# EAGLE board Universal USB-UART Adapter (EAGLE 6.1)
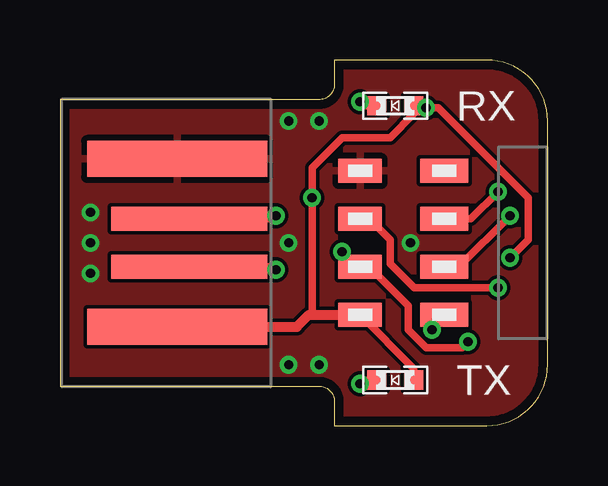
[diagram p0: board, top side]
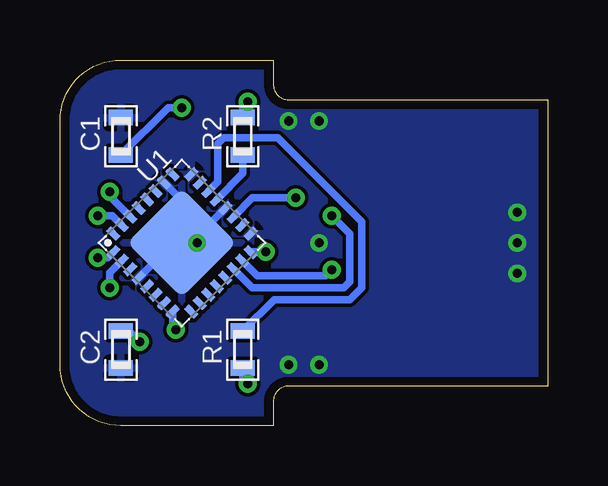
[diagram p1: board, bottom side, seen from below]

Size 20.32 x 15.24 mm. Coordinates in mm from the lower left corner, seen from the top.
Outline: 11.43,0 17.78,0 arc90 20.32,2.54 20.32,12.7 arc90 17.78,15.24 11.43,15.24 11.43,14.22 arc-90 10.79,13.59 0,13.59 0,1.65 10.79,1.65 arc-90 11.43,1.02 11.43,0
Copper layers (1*16): Top 0.0356mm / dielectric 1.5011mm / Bottom 0.0356mm
Design rules: minimum track width 6mil, minimum drill 13mil, track to track 6mil, track to pad 6mil, pad to pad 6mil, via to via 6mil, smd to smd 6mil, copper to edge 15mil, drill to drill 6mil, minimum pad ring 7mil, minimum via ring 7mil, stop-mask expansion 4mil, vias tented up to drill 0mil, thermal gap 10mil

## Footprints (pad centres in the part's own frame; a part is rotated, then mirrored left to right if it is on the bottom)
0603 = smd 0.65 x 1: 1 -0.775,0; 2 0.775,0
0603.LED = smd 0.8 x 0.8: P$1 -0.775,0; P$2 0.775,0
QFN32 = smd 0.6 x 0.3: 1 -2.3,1.75; 2 -2.3,1.25; 3 -2.3,0.75; 4 -2.3,0.25; 5 -2.3,-0.25; 6 -2.3,-0.75; 7 -2.3,-1.25; 8 -2.3,-1.75; 17 2.3,-1.75; 18 2.3,-1.25; 19 2.3,-0.75; 20 2.3,-0.25; 21 2.3,0.25; 22 2.3,0.75; 23 2.3,1.25; 24 2.3,1.75 | smd 0.3 x 0.6: 9 -1.75,-2.3; 10 -1.25,-2.3; 11 -0.75,-2.3; 12 -0.25,-2.3; 13 0.25,-2.3; 14 0.75,-2.3; 15 1.25,-2.3; 16 1.75,-2.3; 25 1.75,2.3; 26 1.25,2.3; 27 0.75,2.3; 28 0.25,2.3; 29 -0.25,2.3; 30 -0.75,2.3; 31 -1.25,2.3; 32 -1.75,2.3 | smd 3.2 x 3.2: EXP 0,0
MMT-104-01-X-DH-X = smd 1 x 1.8: 1 -3,-3.5; 3 -1,-3.5; 5 1,-3.5; 7 3,-3.5 | smd 1 x 2: 2 -3,0; 4 -1,0; 6 1,0; 8 3,0
USB-A-PCB = smd 7.5 x 1.5: 5V -0.2,-3.5; GND -0.2,3.5 | smd 6.5 x 1: USB_M 0.3,-1; USB_P 0.3,1

## Placement (x,y rotation side)
C1  .1uF  [0603]  17.78,12.06 270 bottom
C2  4.7uF  [0603]  17.78,3.17 270 bottom
R1  1k  [0603]  12.7,3.17 90 bottom
R2  1k  [0603]  12.7,12.06 270 bottom
RX  [0603.LED]  13.97,13.34 180 top
TX  [0603.LED]  13.97,1.91 180 top
U1  FT232RQ  [QFN32]  15.24,7.62 45 bottom
U$4  [MMT-104-01-X-DH-X]  16,7.62 270 top
X1  USBPCB  [USB-A-PCB]  5.08,7.62 0 top

## Library data of the parts
C1 C2 R1 R2 RX TX = .standardparts
U1 = ftdichip
U$4 = samtec
X1 = SparkFun

## Nets
3.3V: C2.1 U1.16 U$4.5
5.0V: C1.2 RX.P$1 TX.P$1 U1.1 U1.19 U$4.7 X1.5V
!CTS: U1.8 U$4.8
!DTR: U1.31 U$4.6
D+: U1.14 X1.USB_P
D-: U1.15 X1.USB_M
GND: C1.1 C2.2 U1.4 U1.17 U1.20 U1.24 U1.26 U1.EXP U$4.1 X1.GND
N$1: R2.1 RX.P$2
N$2: R1.2 U1.22
N$3: R1.1 TX.P$2
N$4: R2.2 U1.21
RXI: U1.2 U$4.3
TXO: U1.30 U$4.4

## Tracks (layer width: path | path; a pad name or v marks a point on that pad's centre or on a via)
3.3V  (via drill 0.38)
  Top 0.305: v11.75,7.25 12.38,6.62 U$4.5 12.88,6.62 14.5,5 14.5,4 15.25,3.25 16.75,3.25 v17,3.5
  Bottom 0.305: U1.16 12.36,7.25 v11.75,7.25 | v17,3.5 17.45,3.95 C2.1
5.0V  (via drill 0.38)
  Top 0.305: TX.P$1 14.74,2.38 U$4.7 | 10.37,4.62 10.5,4.75 v10.5,9.5 10.5,10.75 11.75,12 13.75,12 14.74,12.99 RX.P$1 14.83,13.25 v15.25,13.25 15.75,13.25 19.5,9.5 19.5,7.75 v18.75,7
  Top 0.406: X1.5V 9.87,4.12 10.37,4.62 U$4.7
  Bottom 0.305: C1.2 15.82,13.25 v15.25,13.25 | U1.19 12.3,9.5 v10.5,9.5 | U1.1 18.34,7 v18.75,7
!CTS  (via drill 0.38)
  Top 0.305: v15.5,4 16,4.5 U$4.8
  Bottom 0.305: U1.8 15.63,4.13 v15.5,4
!DTR  (via drill 0.38)
  Top 0.305: v18.75,8.75 16.62,6.62 U$4.6
  Bottom 0.305: U1.31 18.14,8.75 v18.75,8.75
D+  (via drill 0.38)
  Top 0.305: v9,8.75 8.87,8.62 X1.USB_P
  Bottom 0.305: U1.14 12.31,5.75 8.5,5.75 8.25,6 8.25,8 v9,8.75
D-  (via drill 0.38)
  Top 0.305: v9,6.5 8.88,6.62 X1.USB_M
  Bottom 0.305: U1.15 12.1,6.25 9.25,6.25 v9,6.5
GND  (via drill 0.38)
  Bottom 0.305: U1.20 14.89,7.62 U1.EXP | U1.4 15.59,7.62 U1.EXP | U1.26 15.25,9.4 15.25,7.75 | v14.61,7.62 U1.EXP
  other vias: 1.27,7.62 1.27,8.89 1.27,6.35 9.53,12.7 10.79,12.7 9.53,2.54 10.79,2.54 9.53,7.62
  pour Bottom: 20.32,0 0,0 0,15.24 20.32,15.24
  pour Top: 0,0 0,15.24 20.32,15.24 20.32,0
N$1  (via drill 0.38)
  Top 0.305: RX.P$2 12.66,13.34 v12.5,13.5
  Bottom 0.305: v12.5,13.5 12.7,13.3 R2.1
N$2
  Bottom 0.305: U1.22 13.75,10.17 13.75,11.75 13.5,12 11.25,12 7.75,8.5 7.75,5.75 8.25,5.25 11.4,5.25 R1.2
N$3  (via drill 0.38)
  Top 0.305: TX.P$2 12.65,1.91 v12.5,1.75
  Bottom 0.305: v12.5,1.75 12.7,1.95 R1.1
N$4
  Bottom 0.305: U1.21 12.7,10.51 R2.2
RXI  (via drill 0.38)
  Top 0.305: v18.25,5.75 14.75,5.75 13.75,6.75 13.75,7.75 12.88,8.62 U$4.3
  Bottom 0.305: U1.2 18.25,6.38 v18.25,5.75
TXO  (via drill 0.38)
  Top 0.305: U$4.4 17.12,8.62 v18.25,9.75
  Bottom 0.305: v18.25,9.75 18.25,9.57 U1.30